# Altium PCB PCB1.PcbDoc
Units mil, origin at the board's own origin, x right, y up, seen from the top; angles counter-clockwise.
Board outline 3228.3 x 354.65 mil, 2 copper layers (Top Layer, Bottom Layer); 10 components, 37 nets, 122 pads, 50 vias.
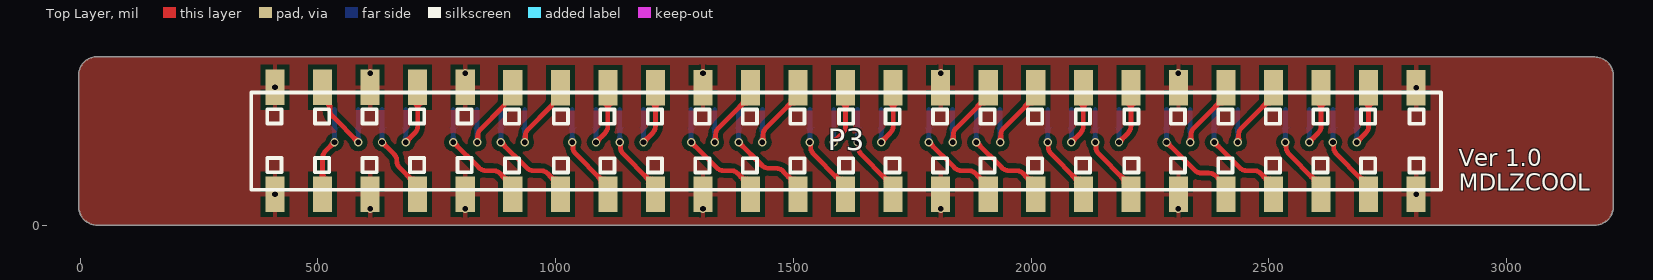
[diagram p0: Top Layer view]
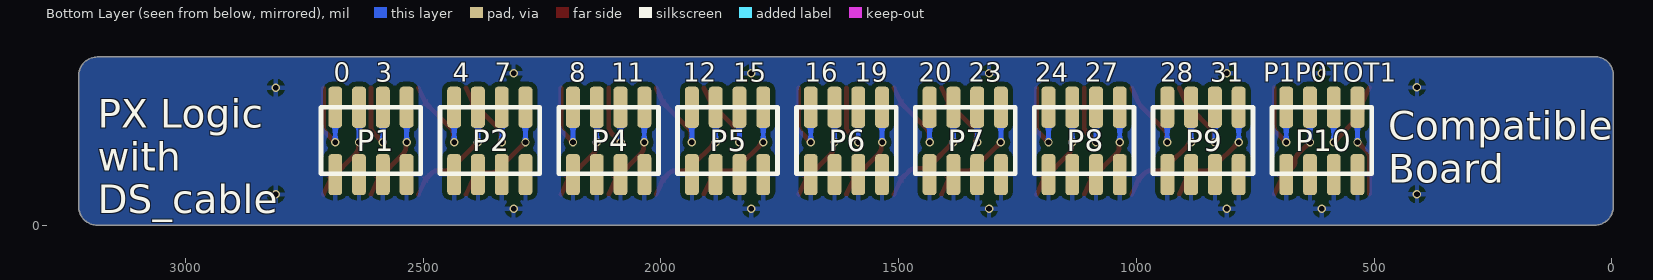
[diagram p1: Bottom Layer view, seen from below]

## Layer stack, top to bottom
Top Solder: solder mask 0.4, Solder Resist, Dk 3.5
Top Layer: signal copper 1.4
Dielectric 1: dielectric 12.6, FR-4, Dk 4.8
Bottom Layer: signal copper 1.4
Bottom Solder: solder mask 0.4, Solder Resist, Dk 3.5

## Board outline
-3.3,39.72 -3.3,315.63 cw(c36.07,315.63) 36.07,355 3185.63,355 3185.63,354.06 cw(c3185.63,314.69) 3225,314.69 3225,39.72 cw(c3185.63,39.72) 3185.63,0.35 36.07,0.35 cw(c36.07,39.72)

## Design rules (kind name [scope] priority, off if disabled: settings)
Clearance [All] p1: gap=10 ignorepadtopadclearanceinfootprint=FALSE except(0: Arc-Hole Track-Hole SMDPad-Hole THPad-Hole Via-Hole Fill-Hole Poly-Hole Region-Hole Text-Hole)
PolygonConnect [All] p1: connectstyle=Relief reliefconductorwidth=10 reliefentries=4 polygonreliefangle="90 Angle" airgapwidth=10
RoutingVias [All] p1: holewidth=28 width=50 viastyle="Through Hole" minholewidth=28 minwidth=50 maxholewidth=28 maxwidth=50
SolderMaskExpansion [All] p1: expansion=4 istentingtop=FALSE
Width [All] p1: maxlimit=10 minlimit=10 preferedwidth=10
30 further rules are at their usual default settings.

## Components (designator, comment, footprint, x,y, rotation, side; value= is the part's Value field where it differs from the comment)
P1 "Header 4X2" HDR-2*4-1.27-SMD 2535,248.37 r0 bottom
P2 "Header 4X2" HDR-2*4-1.27-SMD 2285,248.37 r0 bottom
P3 "Header 25X2" HDR-2*25-2.54-SMD 3215,805 r180 top
P4 "Header 4X2" HDR-2*4-1.27-SMD 2035,248.37 r0 bottom
P5 "Header 4X2" HDR-2*4-1.27-SMD 1785,248.37 r0 bottom
P6 "Header 4X2" HDR-2*4-1.27-SMD 1535,248.37 r0 bottom
P7 "Header 4X2" HDR-2*4-1.27-SMD 1285,248.37 r0 bottom
P8 "Header 4X2" HDR-2*4-1.27-SMD 1035,248.37 r0 bottom
P9 "Header 4X2" HDR-2*4-1.27-SMD 785,248.37 r0 bottom
P10 "Header 4X2" HDR-2*4-1.27-SMD 535,248.37 r0 bottom

## Footprints (in the part's own frame and the unit in brackets; to place one, negate y for a bottom-side part, rotate by r counter-clockwise, add the part's x,y. Pads: shape width x height; smd on the part's side, far side on the other; paste and mask are expansions set on the pad)
HDR-2*4-1.27-SMD [mm] "MDLZCOOL绘制"
  rrect50% 0.74x2.2 smd: 1(0,0) 2(0,3.6) 3(1.27,0) 4(1.27,3.6) 5(2.54,0) 6(2.54,3.6) 7(3.81,0) 8(3.81,3.6)
  silkscreen extent -0.76,0 4.57,3.56
HDR-2*25-2.54-SMD [mm] "MDLZCOOL绘制"
  rect 1.02x1.9 smd: 1(10.287,18.796) 2(10.287,13.096) 3(12.827,18.796) 4(12.827,13.096) 5(15.367,18.796) 6(15.367,13.096) 7(17.907,18.796) 8(17.907,13.096) 9(20.447,18.796) 10(20.447,13.096) 11(22.987,18.796) 12(22.987,13.096) 13(25.527,18.796) 14(25.527,13.096) 15(28.067,18.796) 16(28.067,13.096) 17(30.607,18.796) 18(30.607,13.096) 19(33.147,18.796) 20(33.147,13.096) 21(35.687,18.796) 22(35.687,13.096) 23(38.227,18.796) 24(38.227,13.096) 25(40.767,18.796) 26(40.767,13.096) 27(43.307,18.796) 28(43.307,13.096) 29(45.847,18.796) 30(45.847,13.096) 31(48.387,18.796) 32(48.387,13.096) 33(50.927,18.796) 34(50.927,13.096) 35(53.467,18.796) 36(53.467,13.096) 37(56.007,18.796) 38(56.007,13.096) 39(58.547,18.796) 40(58.547,13.096) 41(61.087,18.781) 42(61.087,13.081) 43(63.627,18.781) 44(63.627,13.081) 45(66.167,18.781) 46(66.167,13.081) 47(68.707,18.781) 48(68.707,13.081) 49(71.247,18.781) 50(71.247,13.081)
  silkscreen extent 8.96,13.35 72.52,18.55, body extent 8.99,12.73 72.55,19.15, height 5.15

## Part data
P1 P2 P4 P5 P6 P7 P8 P9 P10: "Header, 4-Pin, Dual row", LatestRevisionDate=17-Jul-2002, LatestRevisionNote="Re-released for DXP Platform.", Publisher="Altium Limited"
P3: "Header, 25-Pin, Dual row", LatestRevisionDate=17-Jul-2002, LatestRevisionNote="Re-released for DXP Platform.", Publisher="Altium Limited"

## Via types
v1: diameter 17.72, hole 11.81, Top Layer to Bottom Layer, tented both sides, 50 vias

## Nets (pads, with @x,y where several pads share a name; then routed paths per layer and width w, separated by ;. In a path a pad name is that pad's centre, name@x,y a point inside that pad or via, vN(x,y) a via of type N, cw(c..) or ccw(c..) an arc to the next point about the centre after c; other vN are vias at no path point)
CH_0: P1.7 P3.4 | length 192.3
  Top Layer w10: v1(2685,175) 2704.17,194.17 ccw(c2690,208.28) 2710,208.28 P3.4
  Bottom Layer w10: v1(2685,175) P1.7@2685,243.37
CH_1: P1.5 P3.3 | length 205.2
  Top Layer w10: v1(2635,175) cw(c2616.48,167.46) 2636.48,167.46 2636.48,164.13 ccw(c2656.48,164.13) 2642.3,150.02 2694.92,97.4 P3.3
  Bottom Layer w10: v1(2635,175) P1.5@2635,243.37
CH_2: P1.3 P3.6 | length 192.3
  Top Layer w10: v1(2585,175) 2604.17,194.17 ccw(c2590,208.28) 2610,208.28 P3.6
  Bottom Layer w10: v1(2585,175) P1.3@2585,243.37
CH_3: P1.1 P3.5 | length 205.2
  Top Layer w10: v1(2535,175) cw(c2516.48,167.46) 2536.48,167.46 2536.48,164.13 ccw(c2556.48,164.13) 2542.3,150.02 2594.92,97.4 P3.5
  Bottom Layer w10: v1(2535,175) P1.1@2535,243.37
CH_4: P2.7 P3.8 | length 209.7
  Top Layer w10: v1(2435,175) ccw(c2416.48,182.54) 2436.48,182.48 2436.48,190.28 cw(c2456.48,190.28) 2442.3,204.39 2494.92,257.01 P3.8
  Bottom Layer w10: v1(2435,175) P2.7@2435,243.37
CH_5: P2.5 P3.7 | length 244.4
  Top Layer w10: v1(2385,175) 2439.17,120.83 ccw(c2453.28,135) 2453.28,115 2469.04,115 cw(c2469.04,95) 2483.18,109.14 2494.92,97.4 P3.7
  Bottom Layer w10: v1(2385,175) P2.5@2385,243.37
CH_6: P2.3 P3.10 | length 209.7
  Top Layer w10: v1(2335,175) ccw(c2316.48,182.54) 2336.48,182.48 2336.48,190.28 cw(c2356.48,190.28) 2342.3,204.39 2394.92,257.01 P3.10
  Bottom Layer w10: v1(2335,175) P2.3@2335,243.37
CH_7: P2.1 P3.9 | length 244.4
  Top Layer w10: v1(2285,175) 2344.17,115.83 ccw(c2358.28,130) 2358.28,110 2374.04,110 cw(c2374.04,90) 2388.15,104.17 2394.92,97.4 P3.9
  Bottom Layer w10: v1(2285,175) P2.1@2285,243.37
CH_8: P3.14 P4.7 | length 192.3
  Top Layer w10: v1(2185,175) 2204.17,194.17 ccw(c2190,208.28) 2210,208.28 P3.14
  Bottom Layer w10: v1(2185,175) P4.7@2185,243.37
CH_9: P3.13 P4.5 | length 205.2
  Top Layer w10: v1(2135,175) cw(c2116.48,167.46) 2136.48,167.46 2136.48,164.13 ccw(c2156.48,164.13) 2142.3,150.02 2194.92,97.4 P3.13
  Bottom Layer w10: v1(2135,175) P4.5@2135,243.37
CH_10: P3.16 P4.3 | length 192.3
  Top Layer w10: v1(2085,175) 2104.17,194.17 ccw(c2090,208.28) 2110,208.28 P3.16
  Bottom Layer w10: v1(2085,175) P4.3@2085,243.37
CH_11: P3.15 P4.1 | length 205.2
  Top Layer w10: v1(2035,175) cw(c2016.48,167.46) 2036.48,167.46 2036.48,164.13 ccw(c2056.48,164.13) 2042.3,150.02 2094.92,97.4 P3.15
  Bottom Layer w10: v1(2035,175) P4.1@2035,243.37
CH_12: P3.18 P5.7 | length 209.7
  Top Layer w10: v1(1935,175) ccw(c1916.48,182.54) 1936.48,182.48 1936.48,190.28 cw(c1956.48,190.28) 1942.3,204.39 1994.92,257.01 P3.18
  Bottom Layer w10: v1(1935,175) P5.7@1935,243.37
CH_13: P3.17 P5.5 | length 244.4
  Top Layer w10: v1(1885,175) 1939.17,120.83 ccw(c1953.28,135) 1953.28,115 1969.04,115 cw(c1969.04,95) 1983.15,109.17 1994.92,97.4 P3.17
  Bottom Layer w10: v1(1885,175) P5.5@1885,243.37
CH_14: P3.20 P5.3 | length 209.7
  Top Layer w10: v1(1835,175) ccw(c1816.48,182.54) 1836.48,182.48 1836.48,190.28 cw(c1856.48,190.28) 1842.3,204.39 1894.92,257.01 P3.20
  Bottom Layer w10: v1(1835,175) P5.3@1835,243.37
CH_15: P3.19 P5.1 | length 244.4
  Top Layer w10: v1(1785,175) 1839.17,120.83 ccw(c1853.28,135) 1853.28,115 1869.04,115 cw(c1869.04,95) 1883.15,109.17 1894.92,97.4 P3.19
  Bottom Layer w10: v1(1785,175) P5.1@1785,243.37
CH_16: P3.24 P6.7 | length 192.3
  Top Layer w10: v1(1685,175) 1704.17,194.17 ccw(c1690,208.28) 1710,208.28 P3.24
  Bottom Layer w10: v1(1685,175) P6.7@1685,243.37
CH_17: P3.23 P6.5 | length 205.2
  Top Layer w10: v1(1635,175) cw(c1616.48,167.46) 1636.48,167.46 1636.48,164.13 ccw(c1656.48,164.13) 1642.3,150.02 1694.92,97.4 P3.23
  Bottom Layer w10: v1(1635,175) P6.5@1635,243.37
CH_18: P3.26 P6.3 | length 192.3
  Top Layer w10: v1(1585,175) 1604.17,194.17 ccw(c1590,208.28) 1610,208.28 P3.26
  Bottom Layer w10: v1(1585,175) P6.3@1585,243.37
CH_19: P3.25 P6.1 | length 205.2
  Top Layer w10: v1(1535,175) cw(c1516.48,167.46) 1536.48,167.46 1536.48,164.13 ccw(c1556.48,164.13) 1542.3,150.02 1594.92,97.4 P3.25
  Bottom Layer w10: v1(1535,175) P6.1@1535,243.37
CH_20: P3.28 P7.7 | length 209.7
  Top Layer w10: v1(1435,175) ccw(c1416.48,182.54) 1436.48,182.48 1436.48,190.28 cw(c1456.48,190.28) 1442.3,204.39 1494.92,257.01 P3.28
  Bottom Layer w10: v1(1435,175) P7.7@1435,243.37
CH_21: P3.27 P7.5 | length 244.4
  Top Layer w10: v1(1385,175) 1434.17,125.83 ccw(c1448.28,140) 1448.28,120 1464.04,120 cw(c1464.04,100) 1478.15,114.17 1494.92,97.4 P3.27
  Bottom Layer w10: v1(1385,175) P7.5@1385,243.37
CH_22: P3.30 P7.3 | length 209.7
  Top Layer w10: v1(1335,175) ccw(c1316.48,182.54) 1336.48,182.48 1336.48,190.28 cw(c1356.48,190.28) 1342.3,204.39 1394.92,257.01 P3.30
  Bottom Layer w10: v1(1335,175) P7.3@1335,243.37
CH_23: P3.29 P7.1 | length 244.4
  Top Layer w10: v1(1285,175) 1339.17,120.83 ccw(c1353.28,135) 1353.28,115 1369.04,115 cw(c1369.04,95) 1383.15,109.17 1394.92,97.4 P3.29
  Bottom Layer w10: v1(1285,175) P7.1@1285,243.37
CH_24: P3.34 P8.7 | length 192.3
  Top Layer w10: v1(1185,175) 1204.17,194.17 ccw(c1190,208.28) 1210,208.28 P3.34
  Bottom Layer w10: v1(1185,175) P8.7@1185,243.37
CH_25: P3.33 P8.5 | length 205.2
  Top Layer w10: v1(1135,175) cw(c1116.48,167.46) 1136.48,167.46 1136.48,164.13 ccw(c1156.48,164.13) 1142.3,150.02 1194.92,97.4 P3.33
  Bottom Layer w10: v1(1135,175) P8.5@1135,243.37
CH_26: P3.36 P8.3 | length 192.3
  Top Layer w10: v1(1085,175) 1104.17,194.17 ccw(c1090,208.28) 1110,208.28 P3.36
  Bottom Layer w10: v1(1085,175) P8.3@1085,243.37
CH_27: P3.35 P8.1 | length 205.2
  Top Layer w10: v1(1035,175) cw(c1016.48,167.46) 1036.48,167.46 1036.48,164.13 ccw(c1056.48,164.13) 1042.3,150.02 1094.92,97.4 P3.35
  Bottom Layer w10: v1(1035,175) P8.1@1035,243.37
CH_28: P3.38 P9.7 | length 209.2
  Top Layer w10: v1(935,175) ccw(c916.48,182.54) 936.48,182.48 936.48,188.19 cw(c956.48,188.19) 942.3,202.3 988.85,248.85 ccw(c974.67,262.96) 991.06,251.49 994.92,257.01 P3.38
  Bottom Layer w10: v1(935,175) P9.7@935,243.37
CH_29: P3.37 P9.5 | length 244.4
  Top Layer w10: v1(885,175) 939.17,120.82 ; 939.17,120.83 ccw(c953.28,135) 953.28,115 969.04,115 cw(c969.04,95) 983.2,109.12 994.92,97.4 P3.37
  Bottom Layer w10: v1(885,175) P9.5@885,243.37
CH_30: P3.40 P9.3 | length 209.2
  Top Layer w10: v1(835,175) ccw(c816.48,182.54) 836.48,182.48 836.48,188.19 cw(c856.48,188.19) 842.3,202.3 888.85,248.85 ccw(c874.67,262.96) 891.06,251.49 894.92,257.01 P3.40
  Bottom Layer w10: v1(835,175) P9.3@835,243.37
CH_31: P3.39 P9.1 | length 244.4
  Top Layer w10: v1(785,175) 839.17,120.82 ; 839.17,120.83 ccw(c853.28,135) 853.28,115 869.04,115 cw(c869.04,95) 883.2,109.12 894.92,97.4 P3.39
  Bottom Layer w10: v1(785,175) P9.1@785,243.37
GND: P1.2 P1.4 P1.6 P1.8 P2.2 P2.4 P2.6 P2.8 P3.1 P3.2 P3.11 P3.12 P3.21 P3.22 P3.31 P3.32 P3.41 P3.42 P3.45 P3.46 P3.49 P3.50 P4.2 P4.4 P4.6 P4.8 P5.2 P5.4 P5.6 P5.8 P6.2 P6.4 P6.6 P6.8 P7.2 P7.4 P7.6 P7.8 P8.2 P8.4 P8.6 P8.8 P9.2 P9.4 P9.6 P9.8 P10.2 P10.4 P10.6 P10.8
  other v1: 610,35 810,35 1310,35 1810,35 2310,35 2810,65 410,65.59 2810,289.41 410,290 610,320 810,320 1310,320 1810,320 2310,320
P0: P3.48 P10.3 | length 210.7
  Top Layer w10: P3.48 525.08,257.6 525.08,243.21 ccw(c545.08,243.21) 530.91,229.09 v1(585,175)
  Bottom Layer w10: v1(585,175) P10.3@585,243.37
P1: P3.47 P10.1 | length 187.3
  Top Layer w10: P3.47 510,141.72 cw(c530,141.72) 515.83,155.83 v1(535,175)
  Bottom Layer w10: v1(535,175) P10.1@535,243.37
TI: P3.44 P10.7 | length 192.9
  Top Layer w10: v1(685,175) 704.17,194.17 ccw(c690,208.28) 710,208.28 P3.44
  Bottom Layer w10: v1(685,175) P10.7@685,243.37
TO: P3.43 P10.5 | length 204.2
  Top Layer w10: v1(635,175) 660.36,149.64 cw(c646.22,135.49) 666.22,135.49 666.22,134.98 ccw(c686.22,134.98) 672.04,120.87 694.92,97.99 P3.43
  Bottom Layer w10: v1(635,175) P10.5@635,243.37

## Polygon pours and split planes (outlines as drawn)
GND on Top Layer "GND_L01_P000" (solid, remove dead copper, pour order 0): -3.3,39.72 -3.3,315.63 cw(c36.07,315.63) 36.07,355 3185.63,355 3185.63,354.06 cw(c3185.63,314.69) 3225,314.69 3225,39.72 cw(c3185.63,39.72) 3185.63,0.35 36.07,0.35 cw(c36.07,39.72)
GND on Bottom Layer "GND_L02_P001" (solid, remove dead copper, pour order 1): -3.3,39.72 -3.3,315.63 cw(c36.07,315.63) 36.07,355 3185.63,355 3185.63,354.06 cw(c3185.63,314.69) 3225,314.69 3225,39.72 cw(c3185.63,39.72) 3185.63,0.35 36.07,0.35 cw(c36.07,39.72)

## Silkscreen, mask and mechanical layers (free items; w line width, h text height)
Top Overlay:
  text "Ver 1.0 / MDLZCOOL" at 2900,72.22 h35
Bottom Overlay:
  text "P1P0TOT1" at 733,302 h40
  text "28  31" at 949.6,302 h40
  text "24  27" at 1213.17,302 h40
  text "20  23" at 1458,302 h40
  text "16  19" at 1698,302 h40
  text "12  15" at 1953,302 h40
  text "8   11" at 2193,302 h40
  text "4   7" at 2438,302 h40
  text "0   3" at 2688,302 h40
  text "Compatible / Board" at 470,90 h60
  text "PX Logic / with / DS_cable" at 3185,25 h60
Mechanical 1:
  lines w10: 3185.63,354.06 cw(c3185.63,314.69) 3225,314.69 3225,39.72 cw(c3185.63,39.72) 3185.63,0.35 36.07,0.35 cw(c36.07,39.72) -3.3,39.72 -3.3,315.63 cw(c36.07,315.63) 36.07,355 3185.63,355